# Altium PCB Rev5.PcbDoc
Units mil, origin at the board's own origin, x right, y up, seen from the top; angles counter-clockwise.
Board outline 3950 x 3465 mil, 2 copper layers (Top Layer, Bottom Layer); 24 components, 31 nets, 131 pads, 137 vias.
Unrouted connection lines stored in the file: 14.
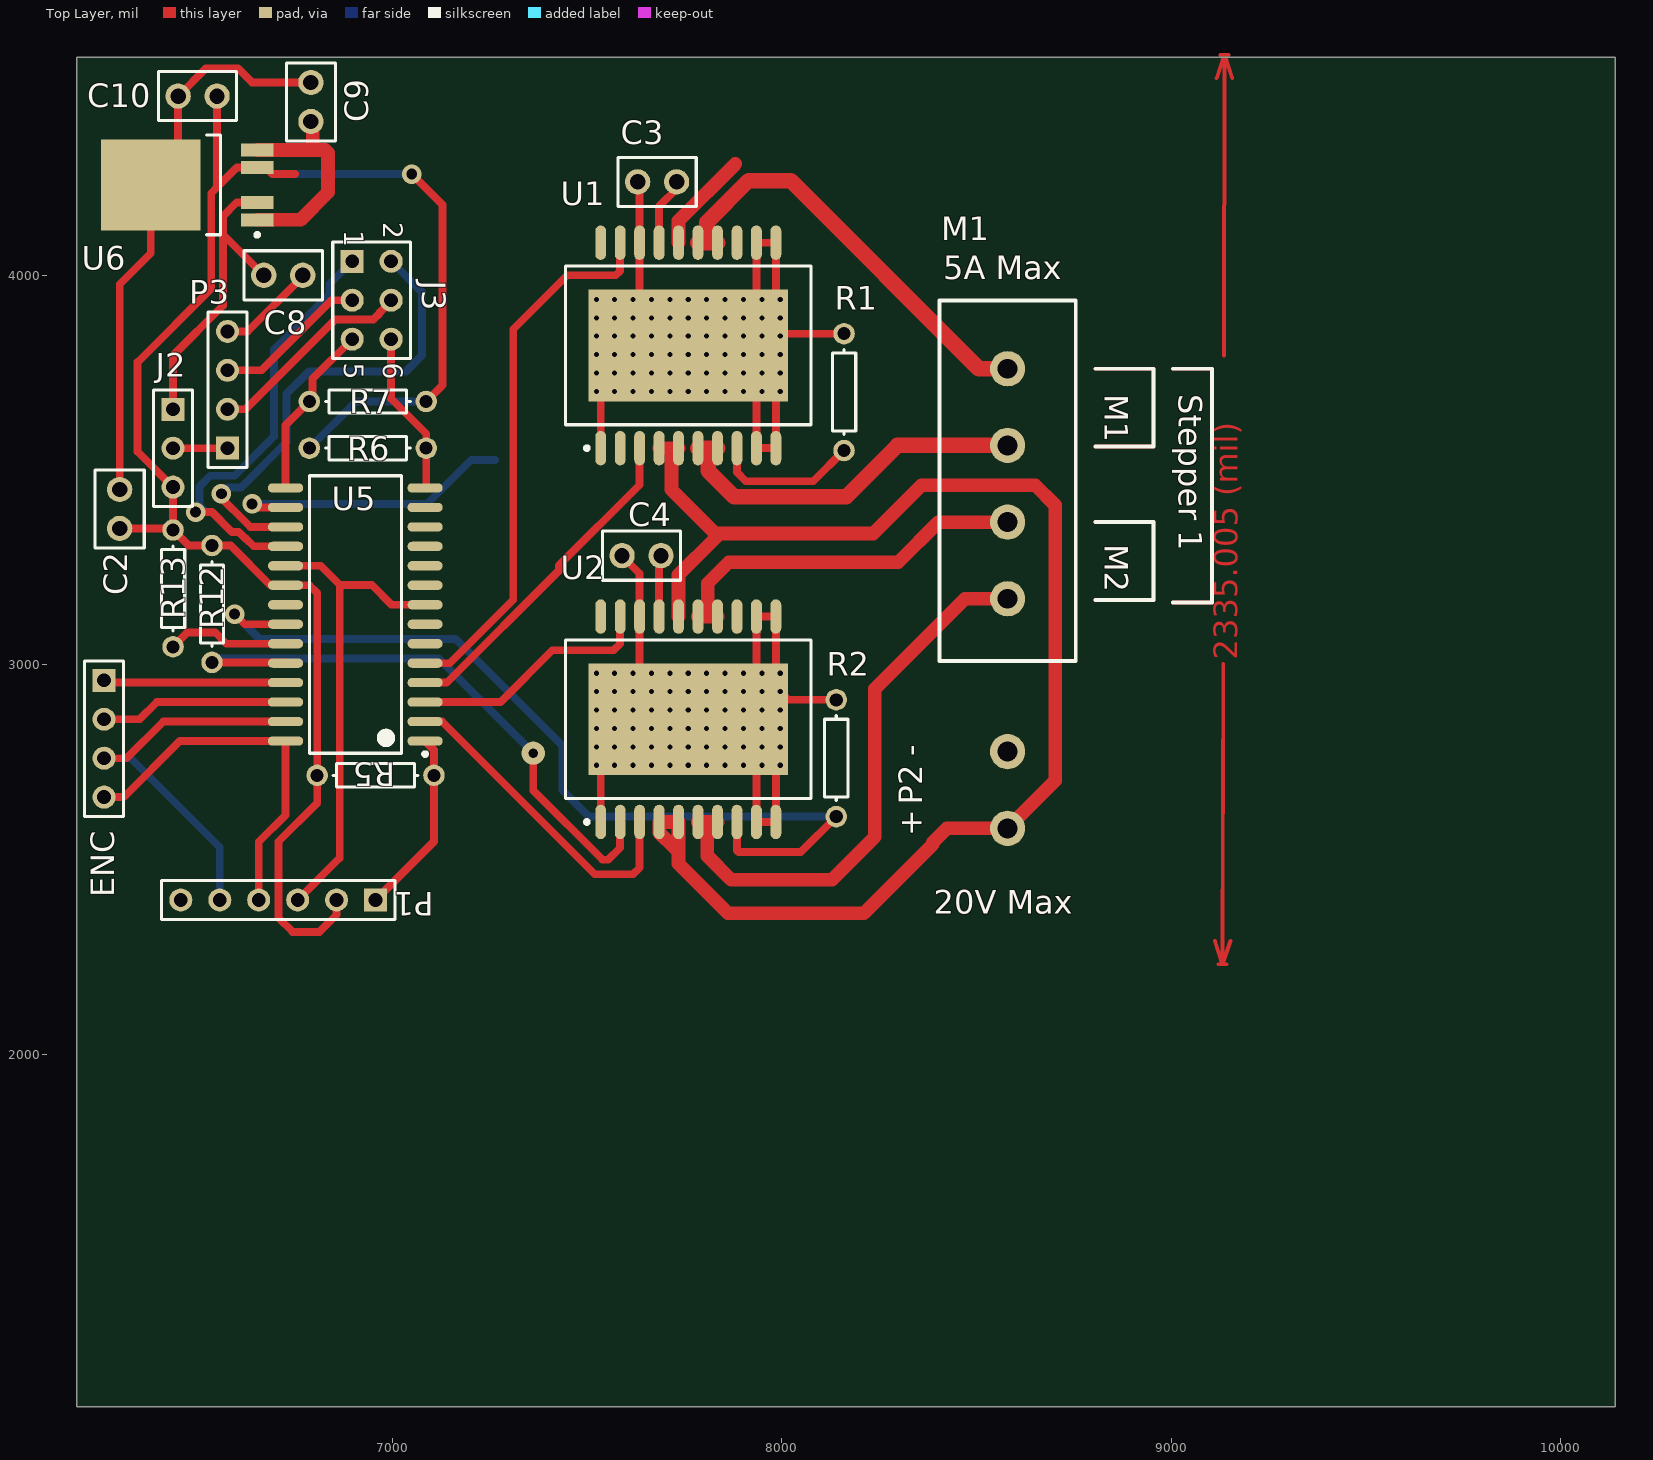
[diagram p0: Top Layer view]
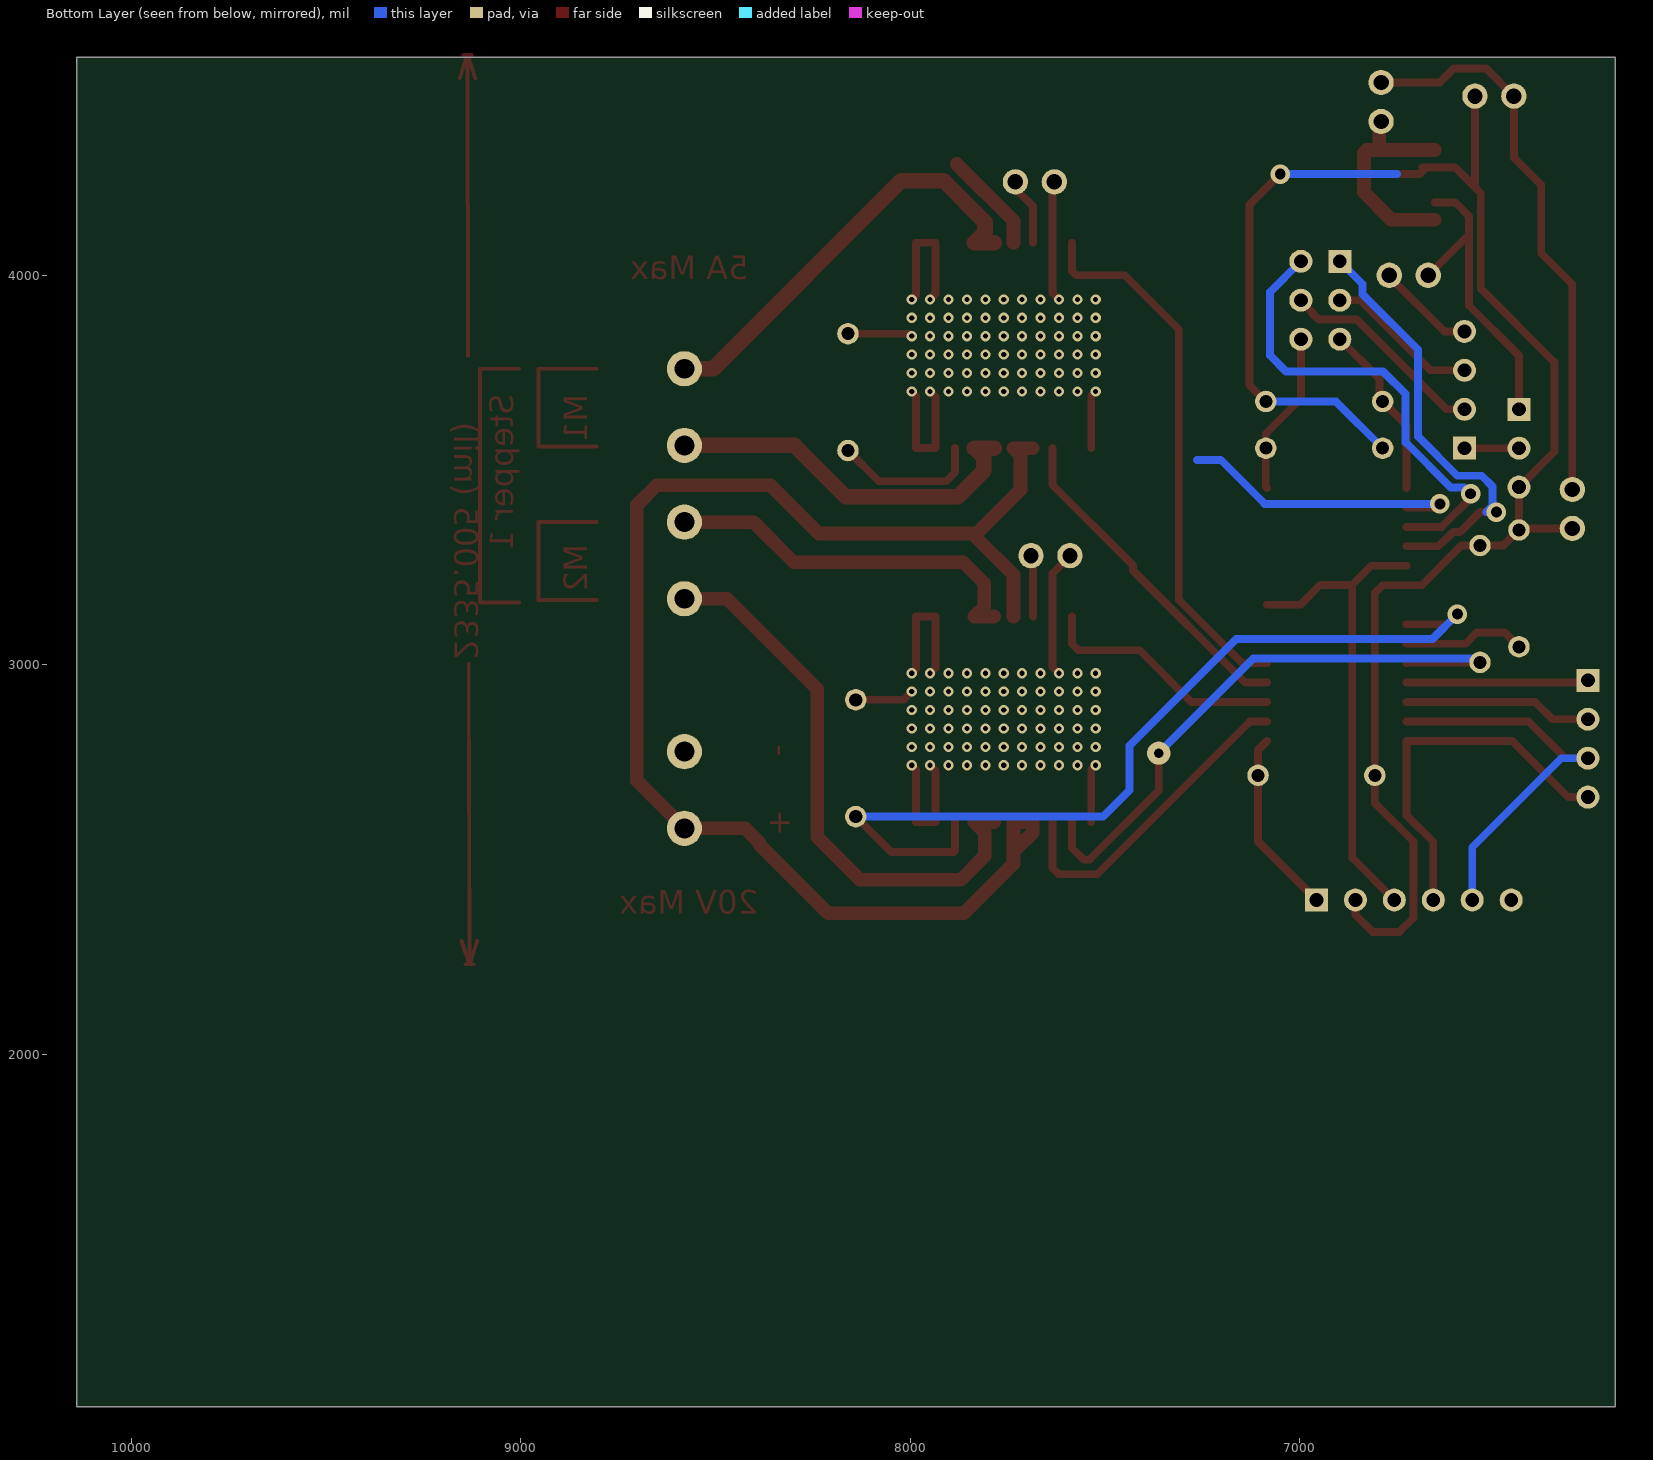
[diagram p1: Bottom Layer view, seen from below]

## Layer stack, top to bottom
Top Layer: signal copper 1.4
Dielectric: dielectric 12.6, FR-4, Dk 4.8
Bottom Layer: signal copper 1.4

## Board outline
6190,4560 6190,1095 10140,1095 10140,4560

## Design rules (kind name [scope] priority, off if disabled: settings)
Clearance [All] p1: gap=10
PolygonConnect [All] p1: connectstyle=Direct reliefconductorwidth=10 reliefentries=4 polygonreliefangle="90 Angle"
RoutingVias [All] p1: holewidth=28 width=50 viastyle="Through Hole" minholewidth=28 minwidth=50 maxholewidth=28 maxwidth=50
SilkToSilkClearance [All] p1: silktosilkclearance=7.87
SilkscreenOverComponentPads [All] p1: minsilkscreentomaskgap=10
SolderMaskExpansion [All] p1: expansion=4
Width "High Current Traces" [InNetClass('High Current')] p1: maxlimit=100 minlimit=35 preferedwidth=50 minimp=50.000000 maximp=50.000000 favimp=50.000000 checkconnectedcopper=TRUE
Width [All] p2: maxlimit=30 minlimit=20 preferedwidth=20
26 further rules are at their usual default settings.

## Classes and differential pairs
net class "High Current": NetM1_1 NetM1_2 NetM1_3 NetM1_4 VPWR

## Components (designator, comment, footprint, x,y, rotation, side; value= is the part's Value field where it differs from the comment)
C2 "Filtering" CAPR2.54-5.1x3.2 6300,3400 r90 top
C3 "Cap" CAPR2.54-5.1x3.2 7680,4240 r0 top
C4 "Cap" CAPR2.54-5.1x3.2 7640,3280 r0 top
C8 "Filtering" CAPR2.54-5.1x3.2 6720,4000 r180 top
C9 "Filtering" CAPR2.54-5.1x3.2 6791,4445 r270 top
C10 "Filtering" CAPR2.54-5.1x3.2 6500,4460 r0 top
ENC "Header 4" HDR1X4 6260,2960 r270 top (schematic designator P11)
J2 "Serial Bus Voltage" HDR1X3 6437,3656 r270 top
J3 "232 / I2C Select" HDR2X3 6897,4036 r270 top
M1 "Motor Header" "MOTOR HEADER" 8580,3760 r270 top
P1 "ICSP" HDR1X6 6957,2396 r180 top
P2 "Power Header" "POWER HEADER" 8580,2580 r90 top
P3 "Serial In" HDR1X4 6577,3556 r90 top
R1 "Current Sense" AXIAL-0.3 8160,3700 r270 top
R2 "Current Sense" AXIAL-0.3 8140,2760 r270 top
R5 "PullUp" AXIAL-0.3 6957,2716 r0 top
R6 "Res1" AXIAL-0.3 6937,3556 r180 top
R7 "Res1" AXIAL-0.3 6937,3676 r0 top
R12 "PullUp" AXIAL-0.3 6537,3156 r270 top
R13 "PullUp" AXIAL-0.3 6437,3196 r270 top
U1 "MC33887" "HSOP20 FREESCALE" 7760,3820 r90 top
U2 "MC33887" "HSOP20 Freescale" 7760,2860 r90 top
U5 "PIC18F2221-E/SO" SOIC-SO28_N 6905,3129 r180 top
U6 "TLE4476" PG-TO252-5-1 6474,4232 r180 top

## Footprints (in the part's own frame and the unit in brackets; to place one, negate y for a bottom-side part, rotate by r counter-clockwise, add the part's x,y. Pads: shape width x height; smd on the part's side, far side on the other; paste and mask are expansions set on the pad)
AXIAL-0.3 [mm] "Axial Device, Thru-Hole; 2 Leads; 0.3 in Pin Spacing"
  round 1.4 hole 0.85: 1(-3.81,0) 2(3.81,0)
  silkscreen extent -2.77,-0.76 2.77,0.76
CAPR2.54-5.1x3.2 [mm] "Capacitor, Ceramic, Thru-Hole, Dipped Radial; Body 5.1 x 3.2 mm (WxT) Pin Spacing 2.54 mm (typ)"
  round 1.65 hole 1: 1(-1.27,0) 2(1.27,0)
  silkscreen extent -2.55,-1.6 2.55,1.6
HDR1X3 [mm] "Connector; Header; 3 Position"
  rect 1.5x1.5 hole 0.9: 1(0,0)
  round 1.5 hole 0.9: 2(2.54,0) 3(5.08,0)
  silkscreen extent -1.27,-1.27 6.35,1.27
HDR1X4 [mm] "Connector; Header; 4 Position"
  rect 1.5x1.5 hole 0.9: 1(0,0)
  round 1.5 hole 0.9: 2(2.54,0) 3(5.08,0) 4(7.62,0)
  silkscreen extent -1.27,-1.27 8.89,1.27
HDR1X6 [mm] "Connector; Header; 6 Position"
  rect 1.5x1.5 hole 0.9: 1(0,0)
  round 1.5 hole 0.9: 2(2.54,0) 3(5.08,0) 4(7.62,0) 5(10.16,0) 6(12.7,0)
  silkscreen extent -1.27,-1.27 13.97,1.27
HDR2X3 [mm] "Connector; Header; 3x2 Position"
  rect 1.5x1.5 hole 0.9: 1(0,0)
  round 1.5 hole 0.9: 2(0,2.54) 3(2.54,0) 4(2.54,2.54) 5(5.08,0) 6(5.08,2.54)
  silkscreen extent -1.27,-1.27 6.35,3.81
"HSOP20 FREESCALE" [mm] "SOP, 20-Leads, Body 16.0x11.1mm (max), Pitch 1.27mm, IPC Low Density"
  oval 2.25x0.7 smd: 1(-6.7,5.715) 2(-6.7,4.445) 3(-6.7,3.175) 4(-6.7,1.905) 5(-6.7,0.635) 6(-6.7,-0.635) 7(-6.7,-1.905) 8(-6.7,-3.175) 9(-6.7,-4.445) 10(-6.7,-5.715) 11(6.7,-5.715) 12(6.7,-4.445) 13(6.7,-3.175) 14(6.7,-1.905) 15(6.7,-0.635) 16(6.7,0.635) 17(6.7,1.905) 18(6.7,3.175) 19(6.7,4.445) 20(6.7,5.715)
  rect 7.3x13 smd: 21(0,0)
  silkscreen extent -6.82,-8 5.18,8, body extent -5.55,-8 5.55,8, height 3.4
"HSOP20 Freescale" [mm] "SOP, 20-Leads, Body 16.0x11.1mm (max), Pitch 1.27mm, IPC Low Density"
  oval 2.25x0.7 smd: 1(-6.7,5.715) 2(-6.7,4.445) 3(-6.7,3.175) 4(-6.7,1.905) 5(-6.7,0.635) 6(-6.7,-0.635) 7(-6.7,-1.905) 8(-6.7,-3.175) 9(-6.7,-4.445) 10(-6.7,-5.715) 11(6.7,-5.715) 12(6.7,-4.445) 13(6.7,-3.175) 14(6.7,-1.905) 15(6.7,-0.635) 16(6.7,0.635) 17(6.7,1.905) 18(6.7,3.175) 19(6.7,4.445) 20(6.7,5.715)
  rect 7.3x13 smd: 21(0,0)
  silkscreen extent -6.82,-8 5.18,8, body extent -5.55,-8 5.55,8, height 3.4
"MOTOR HEADER" [mm] "Custom header for motor connections"
  round 2.3 hole 1.3: 1(0,0) 2(5,0) 3(10,0) 4(15,0)
  Top Layer lines w0.254: 15.08,5.715 15.08,9.525 10,9.525 10,5.715 ; 5.08,5.715 5.08,9.525 0,9.525 0,5.715 ; 15.24,10.795 15.24,13.335 0,13.335 0,10.795
  silkscreen extent -4.45,-4.45 19.05,13.34, body extent -2.49,-4.56 17.51,4.44, height 15.2
PG-TO252-5-1 [mm] "D-PAK, 5-Pads, Body 6.2x6.5mm (max), IPC Low Density"
  rect 2.1x0.85 smd: 1(-4.55,2.28) 2(-4.55,1.14) 4(-4.55,-1.14) 5(-4.55,-2.28)
  rect 6.5x5.95 smd: 3(2.4,0)
  silkscreen extent -4.67,-3.25 -1.25,3.38, body extent -2.15,-3.25 4.07,3.25, height 2.38
"POWER HEADER" [mm] "Custom header for power in"
  round 2.3 hole 1.3: 1(0,0) 2(5,0)
  body extent -2.49,-4.55 7.51,4.45, height 15.2
SOIC-SO28_N [mm] "SOIC, 28-Leads, Body 17.9x7.5mm, Pitch 1.27mm, IPC Medium Density"
  oval 2.3x0.6 smd: 1(-4.55,8.255) 2(-4.55,6.985) 3(-4.55,5.715) 4(-4.55,4.445) 5(-4.55,3.175) 6(-4.55,1.905) 7(-4.55,0.635) 8(-4.55,-0.635) 9(-4.55,-1.905) 10(-4.55,-3.175) 11(-4.55,-4.445) 12(-4.55,-5.715) 13(-4.55,-6.985) 14(-4.55,-8.255) 15(4.55,-8.255) 16(4.55,-6.985) 17(4.55,-5.715) 18(4.55,-4.445) 19(4.55,-3.175) 20(4.55,-1.905) 21(4.55,-0.635) 22(4.55,0.635) 23(4.55,1.905) 24(4.55,3.175) 25(4.55,4.445) 26(4.55,5.715) 27(4.55,6.985) 28(4.55,8.255)
  silkscreen extent -4.67,-9.05 3,9.23, body extent -3.8,-9.06 3.8,9.06, height 2.65

## Part data
C2 C8 C9 C10: library part Cap, "Capacitor"
C3 C4: "Capacitor"
ENC: "Header, 4-Pin"
J2: library part "Header 3", "Header, 3-Pin"
J3: library part "Header 3X2", "Header, 3-Pin, Dual row"
P1: library part "Header 6", "Header, 6-Pin"
P3: library part "Header 4", "Header, 4-Pin"
R1: library part Res1, "1% Non Wirewound"
R2 R5 R12 R13: library part Res1, "Resistor"
R6 R7: "Resistor"
U1 U2: "H-Bridge"
U5: "Enhanced Flash Microcontroller with 10-Bit A/D and nanoWatt Technology, 4K Flash, 28-Pin SOIC, Extended Temperature Range"
U6: "3V3 / 5V0 LDO regulator"

## Free pads (board coordinates)
  round 60 hole 25: 2(7362,2773)

## Via types
v1: diameter 25.98, hole 12.99, Top Layer to Bottom Layer, tented top, 132 vias
v2: diameter 50, hole 28, Top Layer to Bottom Layer, 5 vias

## Nets (pads, with @x,y where several pads share a name; then routed paths per layer and width w, separated by ;. In a path a pad name is that pad's centre, name@x,y a point inside that pad or via, vN(x,y) a via of type N, cw(c..) or ccw(c..) an arc to the next point about the centre after c; other vN are vias at no path point)
3V3: C8.2 J2.1 U6.2 | length 799.7
  Top Layer w20: J2.1 6437,3794 6565,3922 6565,4105 ; U6.2 6601,4187.12 6565,4151.12 6565,4105 ; C8.2 6565,4105
3V3/5V0: J2.2 P3.1 | length 140
  Top Layer w20: J2.2 P3.1
5V0: C2.1 C10.2 J2.3 P1.2 R5.1 R6.2 R7.2 R12.1 R13.1 U1.13 U2.13 U5.20 U6.4 | length 4451.9
  Top Layer w20: C2.1 6433,3350 R13.1 ; C10.2 6550,4225.88 ; U6.4@6685.56,4276.88 U6.4 ; 6750,4260 6692,4260 6675.12,4276.88 U6.4 ; P1.2 6857,2358 6813,2314 6744,2314 6707.47,2350.53 6707.47,2545.47 6807,2645 R5.1 6807,3184 6787,3204 U5.20 6687,3204 6585,3306 R12.1 6477,3306 R13.1 ; v2(7050,4260) 7129,4181 7129,3718 R7.2 ; R13.1 J2.3 6346,3547 6346,3777 6535,3966 6535,4210.88 6550,4225.88 ; 6550,4225.88 6601,4276.88 U6.4
  Bottom Layer w20: 6750,4260 v2(7050,4260) ; R6.2 6907,3676 R7.2
EN: U1.20 U2.20 U5.16 | length 760.4
  Top Layer w20: v2(6640,3413) 6649,3404 U5.16
  Bottom Layer w20: v2(6640,3413) 7090,3413 7203,3526 7264,3526
ENC0: ENC.1 U5.25 | length 459.9
  Top Layer w20: ENC.1@6266,2954 U5.25
ENC1: ENC.2 U5.26 | length 484.1
  Top Layer w20: ENC.2 6351,2860 6395,2904 U5.26
ENC2/PGC: ENC.3 P1.5 U5.27 | length 1031.7
  Top Layer w20: ENC.3 6317.57,2760 6411.57,2854 U5.27
  Bottom Layer w20: ENC.3 6328,2760 6557,2531 P1.5
ENC3/PGD: ENC.4 P1.4 U5.28 | length 962
  Top Layer w20: ENC.4 6310,2660 6454,2804 U5.28 6725.87,2613.87 6657,2545 P1.4
FAULT0: R13.2 U1.2 U5.23 | length 316.2
  Top Layer w20: R13.2 6474,3083 6545,3083 6574,3054 U5.23
FAULT1: pad.2 R12.2 U2.2 U5.24 | length 1594.1
  Top Layer w20: R12.2 6723.87,3006 U5.24 ; pad.2 7362,2677 7540,2499 7554,2499 7585,2530 U2.2
  Bottom Layer w20: R12.2 6547,3016 7119,3016 pad.2@7364,2771
GND: C2.2 C3.1 C4.1 C8.1 C9.1 C10.1 P1.3 P2.2 P3.4 R1.1 R2.1 U1.1 U1.9 U1.10 U1.11 U1.12 U1.18 U1.21 U2.1 U2.9 U2.10 U2.11 U2.12 U2.18 U2.21 U5.8 U5.19 U6.3 | length 5630.2
  Top Layer w20: C2.2 6300,3977 6379.51,4056.51 U6.3 6450,4302.49 C10.1 6521,4531 6604,4531 6640,4495 C9.1 ; P3.4 6629,3856 6770,3997 C8.1 ; U5.19 6816,3254 6865,3205 ; P1.3 6865,2504 6865,3205 ; U5.8 6998,3154 6947,3205 6865,3205 ; v1(7523.78,2741.89) 7535,2730.67 U2.1 ; v1(7523.78,3701.89) 7535,3690.67 U1.1 ; C4.1 7590,3279 7635,3234 U2.18 7635,2994.84 v1(7618.27,2978.11) ; v1(7618.27,3938.11) 7635,3954.84 U1.18 7635,4235 C3.1 ; v1(7948.98,2741.89) 7935,2727.91 U2.9 U2.10 7985,2730.67 v1(7996.22,2741.89) ; v1(7948.98,2978.11) 7935,2992.09 U2.12 U2.11 7985,2989.33 v1(7996.22,2978.11) ; v1(7948.98,3701.89) 7935,3687.91 U1.9 U1.10 7985,3690.67 v1(7996.22,3701.89) ; v1(7948.98,3938.11) 7935,3952.09 U1.12 U1.11 7985,3949.33 v1(7996.22,3938.11) ; v1(7996.22,2930.87) 8017.09,2910 R2.1 ; v1(7996.22,3843.62) 8002.6,3850 R1.1
  other v1: 7571.02,2741.89 7618.27,2741.89 7665.51,2741.89 7712.76,2741.89 7760,2741.89 7807.24,2741.89 7854.49,2741.89 7901.73,2741.89 7523.78,2789.13 7571.02,2789.13 7618.27,2789.13 7665.51,2789.13 7712.76,2789.13 7760,2789.13 7807.24,2789.13 7854.49,2789.13 7901.73,2789.13 7948.98,2789.13 7996.22,2789.13 7523.78,2836.38 7571.02,2836.38 7618.27,2836.38 7665.51,2836.38 7712.76,2836.38 7760,2836.38 7807.24,2836.38 7854.49,2836.38 7901.73,2836.38 7948.98,2836.38 7996.22,2836.38 7523.78,2883.62 7571.02,2883.62 7618.27,2883.62 7665.51,2883.62 7712.76,2883.62 7760,2883.62 7807.24,2883.62 7854.49,2883.62 7901.73,2883.62 7948.98,2883.62 7996.22,2883.62 7523.78,2930.87 7571.02,2930.87 7618.27,2930.87 7665.51,2930.87 7712.76,2930.87 7760,2930.87 7807.24,2930.87 7854.49,2930.87 7901.73,2930.87 7948.98,2930.87 7523.78,2978.11 7571.02,2978.11 7665.51,2978.11 7712.76,2978.11 7760,2978.11 7807.24,2978.11 7854.49,2978.11 7901.73,2978.11 7571.02,3701.89 7618.27,3701.89 7665.51,3701.89 7712.76,3701.89 7760,3701.89 7807.24,3701.89 7854.49,3701.89 7901.73,3701.89 7523.78,3749.13 7571.02,3749.13 7618.27,3749.13 7665.51,3749.13 7712.76,3749.13 7760,3749.13 7807.24,3749.13 7854.49,3749.13 7901.73,3749.13 7948.98,3749.13 7996.22,3749.13 7523.78,3796.38 7571.02,3796.38 7618.27,3796.38 7665.51,3796.38 7712.76,3796.38 7760,3796.38 7807.24,3796.38 7854.49,3796.38 7901.73,3796.38 7948.98,3796.38 7996.22,3796.38 7523.78,3843.62 7571.02,3843.62 7618.27,3843.62 7665.51,3843.62 7712.76,3843.62 7760,3843.62 7807.24,3843.62 7854.49,3843.62 7901.73,3843.62 7948.98,3843.62 7523.78,3890.87 7571.02,3890.87 7618.27,3890.87 7665.51,3890.87 7712.76,3890.87 7760,3890.87 7807.24,3890.87 7854.49,3890.87 7901.73,3890.87 7948.98,3890.87 7996.22,3890.87 7523.78,3938.11 7571.02,3938.11 7665.51,3938.11 7712.76,3938.11 7760,3938.11 7807.24,3938.11 7854.49,3938.11 7901.73,3938.11
IFB0: R1.2 U1.8 U5.21 | length 379.5
  Top Layer w20: U1.8 7885,3494 7908,3471 8081,3471 R1.2
IFB1: R2.2 U2.8 U5.22 | length 2336.4
  Top Layer w20: v2(6595,3130) 6621,3104 U5.22 ; U2.8 7885,2523 7889,2519 8049,2519 R2.2
  Bottom Layer w20: v2(6595,3130) 6659,3066 7163,3066 7437,2792 7437,2678 7505,2610 R2.2
M0-1: U1.19 U5.5 | length 1397.6
  Top Layer w20: U5.5 7147.57,3004 7310.57,3167 7310.57,3861.57 7449,4000 7574,4000 7585,4011 U1.19
M0-2: U1.3 U5.4 | length 863.1
  Top Layer w20: U5.4 7140,2954 7428,3242 7428,3255 7635,3462 U1.3
M1-1: U2.19 U5.3 | length 632.8
  Top Layer w20: U5.3 7278,2904 7411,3037 7568,3037 7585,3054 U2.19
M1-2: U2.3 U5.2 | length 837.5
  Top Layer w20: U5.2 7128,2854 7520,2462 7618,2462 7635,2479 U2.3
M\C\L\R\: P1.1 R5.2 U5.1 | length 479.6
  Top Layer w20: P1.1 7107,2546 R5.2 7107,2781.13 U5.1
NetC3_2: C3.2 U1.17 | length 174.9
  Top Layer w20: U1.17 7685,4177 7730,4222 C3.2
NetC4_2: C4.2 U2.17 | length 158.3
  Top Layer w20: U2.17 7685,3275 C4.2
NetM1_1: M1.1 U1.14 U1.15 | length 1129.8
  Top Layer w40: U1.15 U1.14 7808,4110.78 7808,4136 7915,4243 8023,4243 8506,3760 M1.1
NetM1_2: M1.2 U1.6 U1.7 | length 969.7
  Top Layer w40: U1.6 U1.7 7811,3532.22 7811,3498 7878,3431 8165,3431 8297.15,3563.15 M1.2
NetM1_3: M1.3 U2.14 U2.15 | length 980.7
  Top Layer w35: U2.15 U2.14 7810,3148.78 7810,3209 7864,3263 8299,3263 8402.3,3366.3 M1.3
NetM1_4: M1.4 U2.6 U2.7 | length 1465.7
  Top Layer w35: U2.6 U2.7 7809,2570.22 7809,2509 7870,2448 8129,2448 8239,2558 8239,2938 8470.45,3169.45 M1.4
RX: J3.1 U5.18 | length 1143
  Top Layer w20: v2(6495,3392) 6537,3392 6588,3341 6605.57,3341 6622.57,3324 6624,3324 6644,3304 U5.18
  Bottom Layer w20: v2(6495,3392) 6521,3392 6505,3408 6505,3457.64 6532.36,3485 6595,3485 6696,3586 6696,3809 6839,3952 6839,3978 J3.1
SCL: J3.6 R6.1 U5.14 | length 420.5
  Top Layer w20: J3.6 6997,3683 7087,3593 R6.1 7087,3456.87 U5.14
SDA: J3.5 R7.1 U5.15 | length 452.9
  Top Layer w20: U5.15 6725.87,3614.87 R7.1 6795,3684 6795,3734 J3.5
SERIAL1: J3.4 P3.2 | length 523.6
  Top Layer w20: P3.2 6623,3656 6853.47,3886.47 6951.47,3886.47 6967.04,3902.04 6967.04,3904.04 J3.4@6988,3925
SERIAL2: J3.3 P3.3 | length 394.6
  Top Layer w20: P3.3 6664,3756 6844,3936 J3.3
TX: J3.2 U5.17 | length 1231.5
  Top Layer w20: v2@6550,3439 6635,3354 U5.17
  Bottom Layer w20: v2@6550,3439 6562,3439 6578,3455 6612,3455 6728,3571 6728,3695 6786,3753 7035,3753 7076,3794 7076,3957 J3.2
  other v2: 6561,3439
VPWR: C9.2 P2.1 U1.4 U1.5 U1.16 U2.4 U2.5 U2.16 U6.1 U6.5 | length 4467.1
  Top Layer w35: U6.1 6764.24,4142.24 6835,4213 6835,4314 6827.24,4321.76 6796,4321.76 ; U6.5 6796,4321.76 ; C9.2 6796,4390 6796,4321.76 ; U1.4 U1.5 7716.78,3538 7716.78,3449.22 7829,3337 ; 7724,2530 7685,2569 U2.4 U2.5 7735,2489 7862,2362 8210.89,2362 8387.5,2538.61 8387.5,2543.5 8424,2580 P2.1 8702,2702 8702,3410 8651,3461 8359,3461 8235,3337 7829,3337 ; U2.16 7735,3231 7829,3325 7829,3337 ; U1.16 7735,4140 7881,4286
pads on no net: P1.6 U5.6 U5.7 U5.9 U5.10 U5.11 U5.12 U5.13
copper on no net: | length 1836.2
  Top Layer w10: 9112.13,2291.04 9132,2231 ; 9116.87,4506.04 9137,4566 ; 9122,2231.02 9142,2230.98 ; 9127,4566.02 9147,4565.98 ; 9133.65,3002.62 9132,2231 ; 9135.35,3794.38 9137,4566 ; 9152.13,2290.96 9132,2231 ; 9156.87,4505.96 9137,4566

## Other copper
Top Layer:
  text "2335.005 (mil)" at 9169.66,3012.55 h60 r89.88

## Dimensions
6187.44,2375.99 to 9132.44,2217.99 on Top Layer

## Text inside footprints (layer, text, board x,y; h text height)
J3: Top Overlay "6" at 6977,3776 h50 r270; Top Overlay "5" at 6877,3776 h50 r270; Top Overlay "2" at 6977,4136 h50 r270; Top Overlay "1" at 6877,4116 h50 r270
M1: Top Overlay "5A Max" at 8415,3990 h60; Top Overlay "Stepper 1" at 9020,3695 h60 r270; Top Overlay "M2" at 8830,3310 h60 r270; Top Layer "5A Max" at 8415,3990 h60; Top Layer "M2" at 8830,3310 h60 r270; Top Layer "Stepper 1" at 9020,3695 h60 r270
P2: Top Overlay "20V Max" at 8390,2361 h60; Top Overlay "+" at 8360,2560 h60 r90; Top Overlay "-" at 8360,2765 h60 r90; Top Layer "20V Max" at 8390,2361 h60; Top Layer "-" at 8360,2765 h60 r90; Top Layer "+" at 8360,2560 h60 r90